# Altium PCB Main.PcbDoc
Units mil, origin at the board's own origin, x right, y up, seen from the top; angles counter-clockwise.
Board outline 2640 x 3555 mil, 2 copper layers (Top Layer, Bottom Layer); 7 components, 18 nets, 258 pads, 0 vias.
Unrouted connection lines stored in the file: 35.
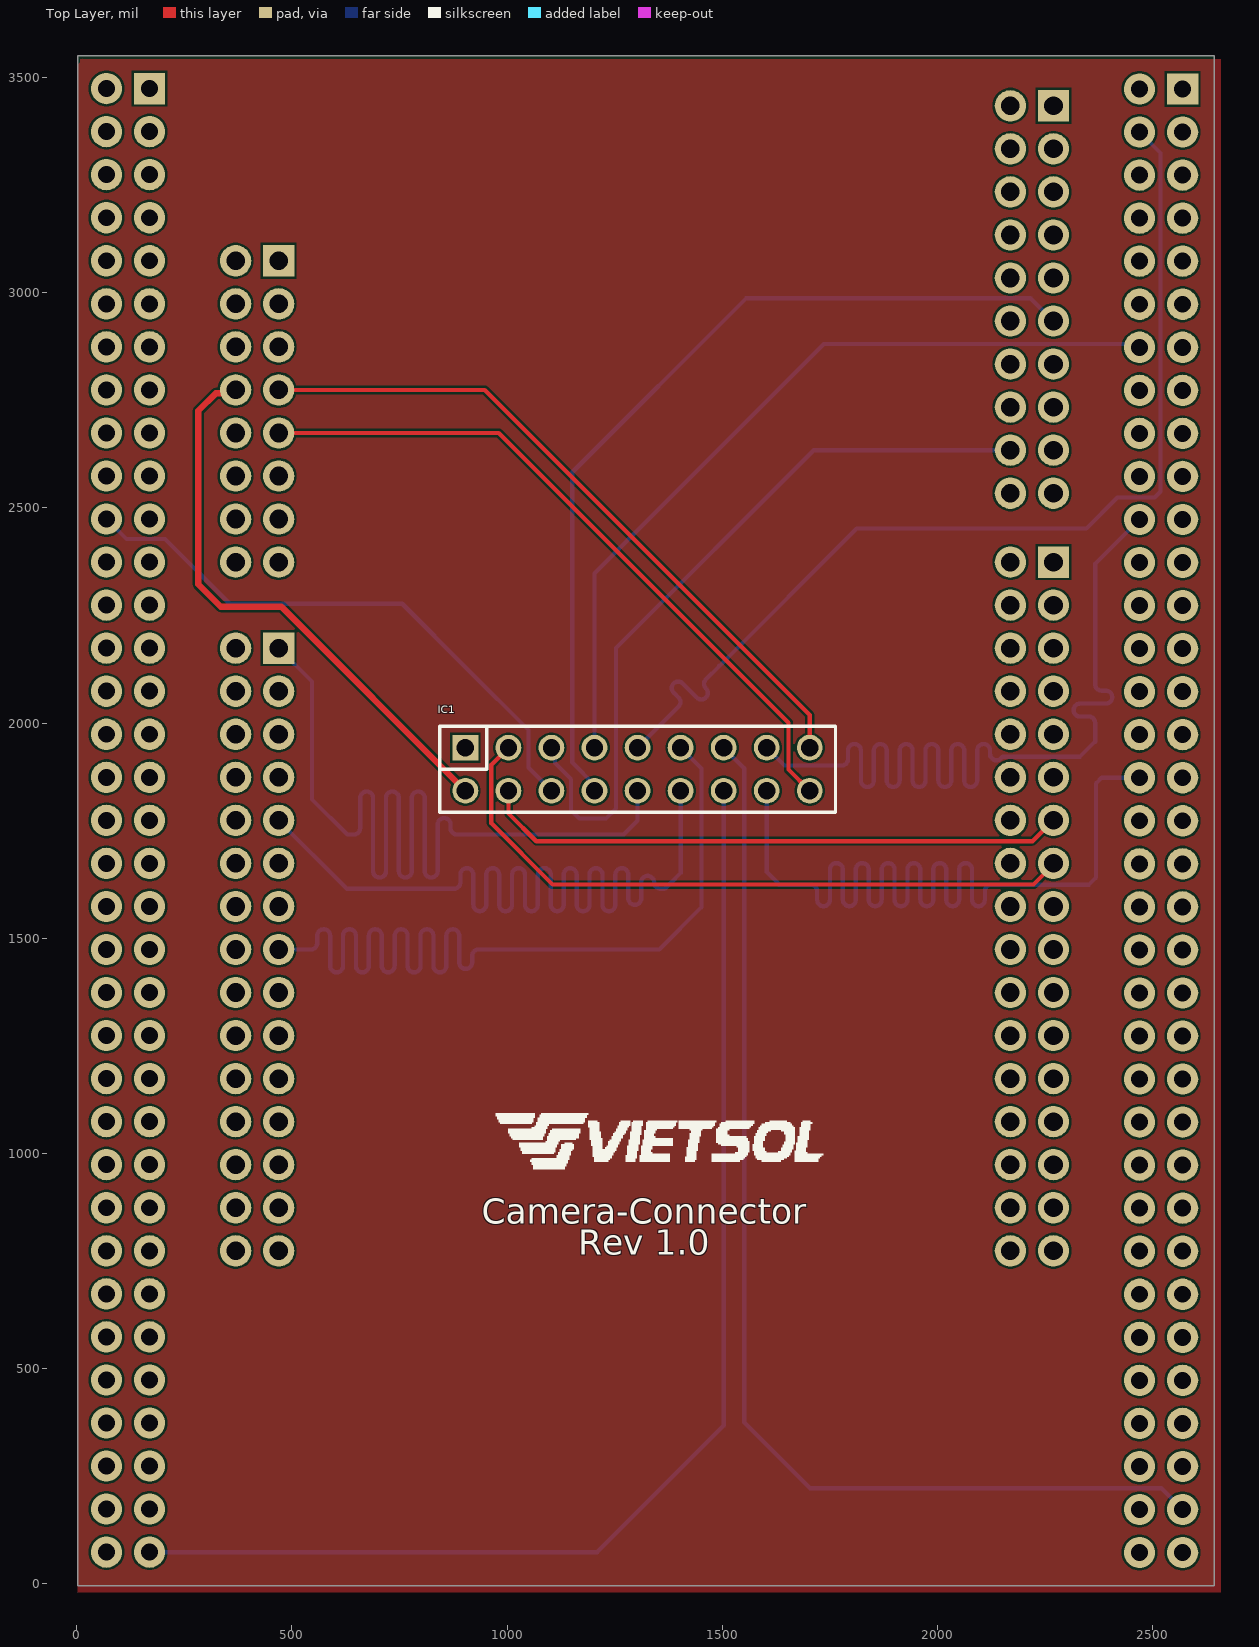
[diagram p0: Top Layer view]
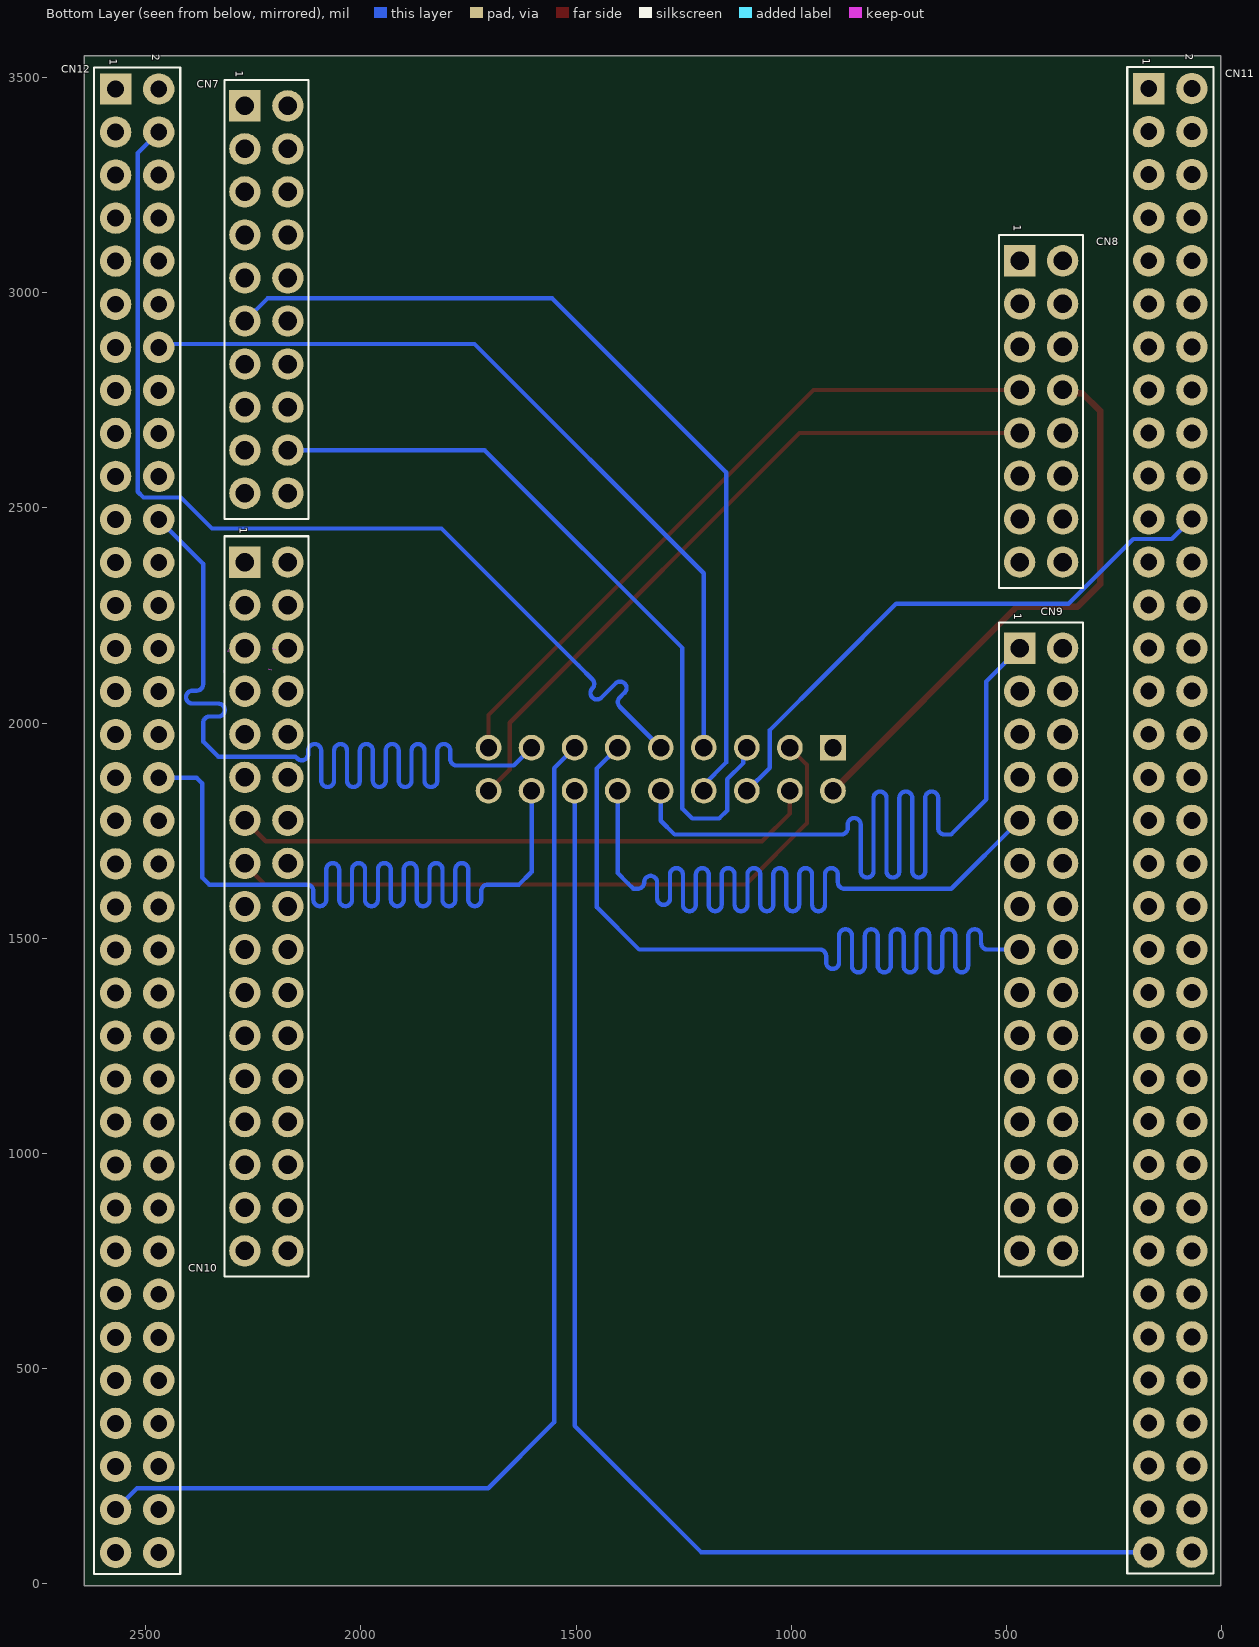
[diagram p1: Bottom Layer view, seen from below]
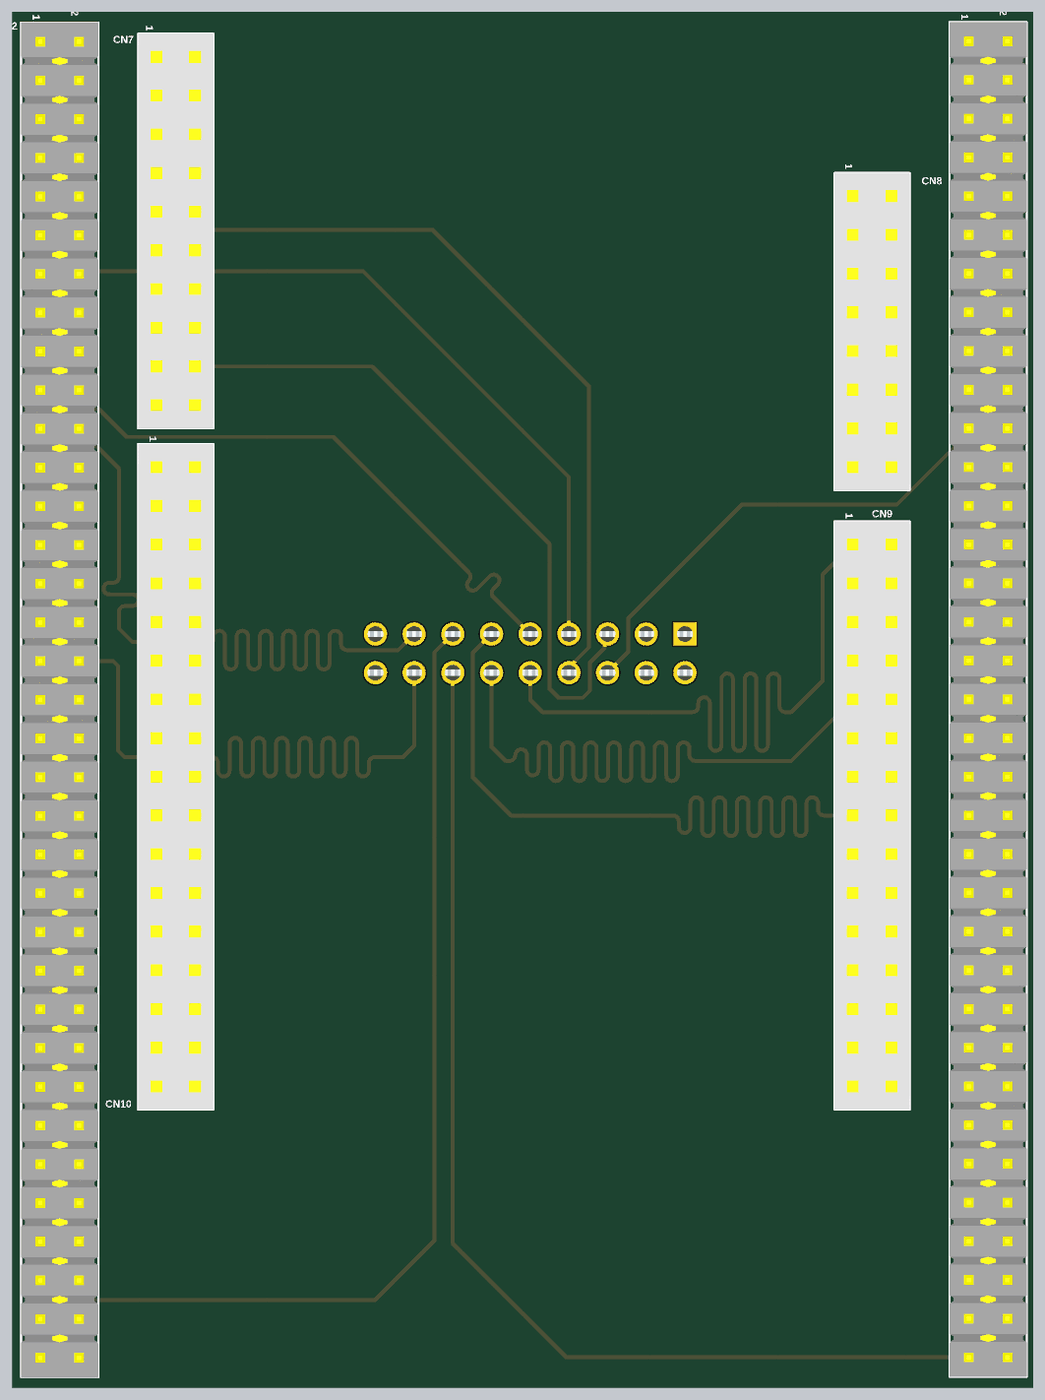
[diagram p2: 3D render of the assembled board from below, using the file's embedded part models]

## Layer stack, top to bottom
Top Solder: solder mask 0.4, Solder Resist, Dk 3.5
Top Layer: signal copper 1.4
Dielectric 1: dielectric 12.6, FR-4, Dk 4.8
Bottom Layer: signal copper 1.4
Bottom Solder: solder mask 0.4, Solder Resist, Dk 3.5

## Board outline
2.54,-4.58 2642.54,-4.58 2642.54,3550.42 2.54,3550.42

## Design rules (kind name [scope] priority, off if disabled: settings)
Clearance Clearance_1 [InNamedPolygon('Kyuubi')] p1: gap=12 ignorepadtopadclearanceinfootprint=FALSE
Clearance [All] p2: gap=5 ignorepadtopadclearanceinfootprint=TRUE
Length [InNetClass('Data')] p1: maxlimit=100000 minlimit=0
MatchedLengths [InNetClass('Data')] p1: tolerance=1000 checknetsindiffpair=FALSE checkdiffpairvsdiffpair=TRUE checkxsignals=TRUE checkothers=TRUE
PolygonConnect [All] p1: connectstyle=Relief reliefconductorwidth=10 reliefentries=4 polygonreliefangle="90 Angle" airgapwidth=10
RoutingVias [All] p1: holewidth=28 width=50 viastyle="Through Hole" minholewidth=28 minwidth=50 maxholewidth=28 maxwidth=50
SolderMaskExpansion [All] p1: expansion=4 istentingtop=FALSE
Width [All] p1: maxlimit=60 minlimit=10 preferedwidth=20
30 further rules are at their usual default settings.

## Classes and differential pairs
net class Data: D0 D1 D2 D3 D4 D5 D6 D7 PLK XLK
component class Main: IC1

## Components (designator, comment, footprint, x,y, rotation, side; value= is the part's Value field where it differs from the comment)
CN7 "Socket 10x2_N144_ARD" CON_SAMTEC_SSW-110-23-X-D_N144_ARD 2219.48,2983.91 r90 bottom locked
CN8 "Socket 8x2_N144_ARD" CON_SAMTEC_SSW-108-23-X-D_N144_ARD 419.48,2723.91 r90 bottom locked
CN9 "Socket 15x2_N144_ARD" CON_SAMTEC_SSW-115-23-X-D_N144_ARD 419.48,1473.91 r90 bottom locked
CN10 "Socket 17x2_N144_ARD" CON_SAMTEC_SSW-117-23-X-D_N144_ARD 2219.48,1573.91 r90 bottom locked
CN11 "Header 35x2" CON_SAMTEC_TSW-135-07-X-D 119.48,1773.91 r270 bottom locked
CN12 "Header 35x2" CON_SAMTEC_TSW-135-07-X-D 2519.48,1772.93 r270 bottom locked
IC1 "Header 2*9 2.54cm" "Header 2*9 2.54cm" 1076.27,1959.77 r0 top

## Footprints (in the part's own frame and the unit in brackets; to place one, negate y for a bottom-side part, rotate by r counter-clockwise, add the part's x,y. Pads: shape width x height; smd on the part's side, far side on the other; paste and mask are expansions set on the pad)
CON_SAMTEC_SSW-108-23-X-D_N144_ARD [mm] "NUCLEO144_ARDUINO CONNECTOR"
  rect 1.85x1.85 / inner round 1.85 / far side rect 1.85x1.85 hole 1.1 mask+0.05: 1(8.89,1.27)
  round 1.85 hole 1.1 mask+0.05: 2(8.89,-1.27) 3(6.35,1.27) 4(6.35,-1.27) 5(3.81,1.27) 6(3.81,-1.27) 7(1.27,1.27) 8(1.27,-1.27) 9(-1.27,1.27) 10(-1.27,-1.27) 11(-3.81,1.27) 12(-3.81,-1.27) 13(-6.35,1.27) 14(-6.35,-1.27) 15(-8.89,1.27) 16(-8.89,-1.27)
  silkscreen extent -10.42,-2.47 10.42,2.47, body extent -10.42,-2.48 10.42,2.48, height 8.51
CON_SAMTEC_SSW-110-23-X-D_N144_ARD [mm] "NUCLEO144_ARDUINO CONNECTOR"
  rect 1.85x1.85 / inner round 1.85 / far side rect 1.85x1.85 hole 1.1 mask+0.05: 1(11.43,1.27)
  round 1.85 hole 1.1 mask+0.05: 2(11.43,-1.27) 3(8.89,1.27) 4(8.89,-1.27) 5(6.35,1.27) 6(6.35,-1.27) 7(3.81,1.27) 8(3.81,-1.27) 9(1.27,1.27) 10(1.27,-1.27) 11(-1.27,1.27) 12(-1.27,-1.27) 13(-3.81,1.27) 14(-3.81,-1.27) 15(-6.35,1.27) 16(-6.35,-1.27) 17(-8.89,1.27) 18(-8.89,-1.27) 19(-11.43,1.27) 20(-11.43,-1.27)
  silkscreen extent -12.96,-2.47 12.96,2.47, body extent -12.96,-2.48 12.96,2.48, height 8.51
CON_SAMTEC_SSW-115-23-X-D_N144_ARD [mm] "NUCLEO144_ARDUINO CONNECTOR"
  rect 1.85x1.85 / inner round 1.85 / far side rect 1.85x1.85 hole 1.1 mask+0.05: 1(17.78,1.27)
  round 1.85 hole 1.1 mask+0.05: 2(17.78,-1.27) 3(15.24,1.27) 4(15.24,-1.27) 5(12.7,1.27) 6(12.7,-1.27) 7(10.16,1.27) 8(10.16,-1.27) 9(7.62,1.27) 10(7.62,-1.27) 11(5.08,1.27) 12(5.08,-1.27) 13(2.54,1.27) 14(2.54,-1.27) 15(0,1.27) 16(0,-1.27) 17(-2.54,1.27) 18(-2.54,-1.27) 19(-5.08,1.27) 20(-5.08,-1.27) 21(-7.62,1.27) 22(-7.62,-1.27) 23(-10.16,1.27) 24(-10.16,-1.27) 25(-12.7,1.27) 26(-12.7,-1.27) 27(-15.24,1.27) 28(-15.24,-1.27) 29(-17.78,1.27) 30(-17.78,-1.27)
  silkscreen extent -19.31,-2.47 19.31,2.47, body extent -19.31,-2.48 19.31,2.48, height 8.51
CON_SAMTEC_SSW-117-23-X-D_N144_ARD [mm] "NUCLEO144_ARDUINO CONNECTOR"
  rect 1.85x1.85 / inner round 1.85 / far side rect 1.85x1.85 hole 1.1 mask+0.05: 1(20.32,1.27)
  round 1.85 hole 1.1 mask+0.05: 2(20.32,-1.27) 3(17.78,1.27) 4(17.78,-1.27) 5(15.24,1.27) 6(15.24,-1.27) 7(12.7,1.27) 8(12.7,-1.27) 9(10.16,1.27) 10(10.16,-1.27) 11(7.62,1.27) 12(7.62,-1.27) 13(5.08,1.27) 14(5.08,-1.27) 15(2.54,1.27) 16(2.54,-1.27) 17(0,1.27) 18(0,-1.27) 19(-2.54,1.27) 20(-2.54,-1.27) 21(-5.08,1.27) 22(-5.08,-1.27) 23(-7.62,1.27) 24(-7.62,-1.27) 25(-10.16,1.27) 26(-10.16,-1.27) 27(-12.7,1.27) 28(-12.7,-1.27) 29(-15.24,1.27) 30(-15.24,-1.27) 31(-17.78,1.27) 32(-17.78,-1.27) 33(-20.32,1.27) 34(-20.32,-1.27)
  silkscreen extent -21.85,-2.47 21.85,2.47, body extent -21.85,-2.48 21.85,2.48, height 8.51
CON_SAMTEC_TSW-135-07-X-D [mm]
  rect 1.85x1.85 / inner round 1.85 / far side rect 1.85x1.85 hole 1 mask+0.05: 1(-43.18,-1.27)
  round 1.85 hole 1 mask+0.05: 2(-43.18,1.27) 3(-40.64,-1.27) 4(-40.64,1.27) 5(-38.1,-1.27) 6(-38.1,1.27) 7(-35.56,-1.27) 8(-35.56,1.27) 9(-33.02,-1.27) 10(-33.02,1.27) 11(-30.48,-1.27) 12(-30.48,1.27) 13(-27.94,-1.27) 14(-27.94,1.27) 15(-25.4,-1.27) 16(-25.4,1.27) 17(-22.86,-1.27) 18(-22.86,1.27) 19(-20.32,-1.27) 20(-20.32,1.27) 21(-17.78,-1.27) 22(-17.78,1.27) 23(-15.24,-1.27) 24(-15.24,1.27) 25(-12.7,-1.27) 26(-12.7,1.27) 27(-10.16,-1.27) 28(-10.16,1.27) 29(-7.62,-1.27) 30(-7.62,1.27) 31(-5.08,-1.27) 32(-5.08,1.27) 33(-2.54,-1.27) 34(-2.54,1.27) 35(0,-1.27) 36(0,1.27) 37(2.54,-1.27) 38(2.54,1.27) 39(5.08,-1.27) 40(5.08,1.27) 41(7.62,-1.27) 42(7.62,1.27) 43(10.16,-1.27) 44(10.16,1.27) 45(12.7,-1.27) 46(12.7,1.27) 47(15.24,-1.27) 48(15.24,1.27) 49(17.78,-1.27) 50(17.78,1.27) 51(20.32,-1.27) 52(20.32,1.27) 53(22.86,-1.27) 54(22.86,1.27) 55(25.4,-1.27) 56(25.4,1.27) 57(27.94,-1.27) 58(27.94,1.27) 59(30.48,-1.27) 60(30.48,1.27) 61(33.02,-1.27) 62(33.02,1.27) 63(35.56,-1.27) 64(35.56,1.27) 65(38.1,-1.27) 66(38.1,1.27) 67(40.64,-1.27) 68(40.64,1.27) 69(43.18,-1.27) 70(43.18,1.27)
  silkscreen extent -44.45,-2.54 44.45,2.54, body extent -44.45,-2.54 44.45,2.54, height 8.38
"Header 2*9 2.54cm" [mm]
  rect 1.52x1.52 hole 1.02: 1(-4.394,-0.432)
  round 1.52 hole 1.02: 2(-1.854,-0.432) 3(0.686,-0.432) 4(3.226,-0.432) 5(5.766,-0.432) 6(8.306,-0.432) 7(10.846,-0.432) 8(13.386,-0.432) 9(15.926,-0.432) 10(15.926,-2.972) 11(13.386,-2.972) 12(10.846,-2.972) 13(8.306,-2.972) 14(5.766,-2.972) 15(3.226,-2.972) 16(0.686,-2.972) 17(-1.854,-2.972) 18(-4.394,-2.972)
  silkscreen extent -5.91,-4.24 17.45,0.84, body extent -5.91,-4.24 17.45,0.84, height 8.51

## Part data
CN7: library part MCD-01039, "Socket, 10x2, 2.54mm, VR, TH, Height 8.51mm/10mm, Low insertion force.", Manufacturer=SAMTEC, Manufacturer_Part_Number=SSW-110-23-x-D, ComponentLink1Description=Datasheet, ComponentLink1URL=http://tunmcdsvn.tun.st.com/Component_Datasheet_Library/Trunk/Connectors/Samtec_SSW-SSQ-series, Initial_Board_Reference=MB1361, Internal_Part_Number=MCD-01039, Part_Type=Connector, Provided_By=Subcon, Remark="Socket dedicated to Arduino+ZIO connector on NUCLEO144", Status=Checked
CN8: library part MCD-01037, "Socket, 8x2, 2.54mm, VR, TH, Height 8.51mm/10mm, Low insertion force.", Manufacturer=SAMTEC, Manufacturer_Part_Number=SSW-108-23-x-D, ComponentLink1Description=Datasheet, ComponentLink1URL=http://tunmcdsvn.tun.st.com/Component_Datasheet_Library/Trunk/Connectors/Samtec_SSW-SSQ-series, Initial_Board_Reference=MB1361, Internal_Part_Number=MCD-01037, Part_Type=Connector, Provided_By=Subcon, Remark="Socket dedicated to Arduino+ZIO connector on NUCLEO144", Status=Checked
CN9: library part MCD-01040, "Socket, 15x2, 2.54mm, VR, TH, Height 8.51mm/10mm, Low insertion force.", Manufacturer=SAMTEC, Manufacturer_Part_Number=SSW-115-23-x-D, ComponentLink1Description=Datasheet, ComponentLink1URL=http://tunmcdsvn.tun.st.com/Component_Datasheet_Library/Trunk/Connectors/Samtec_SSW-SSQ-series, Initial_Board_Reference=MB1361, Internal_Part_Number=MCD-01040, Part_Type=Connector, Provided_By=Subcon, Remark="Socket dedicated to Arduino+ZIO connector on NUCLEO144", Status=Checked
CN10: library part MCD-01041, "Socket, 17x2, 2.54mm, VR, TH, Height 8.51mm/10mm, Low insertion force", Manufacturer=SAMTEC, Manufacturer_Part_Number=SSW-117-23-x-D, ComponentLink1Description=Datasheet, ComponentLink1URL=http://tunmcdsvn.tun.st.com/Component_Datasheet_Library/Trunk/Connectors/Samtec_SSW-SSQ-series, Initial_Board_Reference=MB1361, Internal_Part_Number=MCD-01041, Part_Type=Connector, Provided_By=Subcon, Remark="Socket dedicated to Arduino+ZIO connector on NUCLEO144", Status=Checked
CN11 CN12: library part MCD-01210, "Header, 35x2, 2,54mm, VR, TH, Height 5.84mm/2.54mm", Manufacturer=SAMTEC, Manufacturer_Part_Number=TSW-135-07-x-D, ComponentLink1Description=Datasheet, ComponentLink1URL=http://tunmcdsvn.tun.st.com/Component_Datasheet_Library/Trunk/Connectors/Samtec_TSW-HTSW-series, Initial_Board_Reference=MB1361, Internal_Part_Number=MCD-01210, Part_Type=Connector, Provided_By=Subcon, Status=Checked

## Nets (pads, with @x,y where several pads share a name; then routed paths per layer and width w, separated by ;. In a path a pad name is that pad's centre, name@x,y a point inside that pad or via, vN(x,y) a via of type N, cw(c..) or ccw(c..) an arc to the next point about the centre after c; other vN are vias at no path point)
3V3: CN8.8 CN11.6 CN11.15 IC1.18 | length 1328.9
  Top Layer w15: CN8.8 361.84,2766.27 323.81,2766.27 282.7,2725.17 282.7,2322.58 335.28,2270 476.05,2270 IC1.18
D0: CN7.2 CN12.3 CN12.22 IC1.8 | length 2430.6
  Bottom Layer w10: IC1.8 1644.85,1901.19 1772.16,1901.19 1777.16,1901.19 ccw(c1777.16,1916.19) 1792.16,1916.19 1792.16,1936.19 cw(c1807.16,1936.19) 1822.16,1936.19 1822.16,1866.19 ccw(c1837.16,1866.19) 1852.16,1866.19 1852.16,1936.19 cw(c1867.16,1936.19) 1882.16,1936.19 1882.16,1866.19 ccw(c1897.16,1866.19) 1912.16,1866.19 1912.16,1936.19 cw(c1927.16,1936.19) 1942.16,1936.19 1942.16,1866.19 ccw(c1957.16,1866.19) 1972.16,1866.19 1972.16,1936.19 cw(c1987.16,1936.19) 2002.16,1936.19 2002.16,1866.19 ccw(c2017.16,1866.19) 2032.16,1866.19 2032.16,1936.19 cw(c2047.16,1936.19) 2062.16,1936.19 2062.16,1866.19 ccw(c2077.16,1866.19) 2092.16,1866.19 2092.16,1936.19 cw(c2107.16,1936.19) 2122.16,1936.19 2122.16,1928.45 ccw(c2137.16,1928.45) 2147.77,1917.84 2151.82,1921.89 2201.67,1921.89 2331.34,1921.89 2366.26,1956.82 2366.26,1995.17 2366.26,2000.17 ccw(c2351.26,2000.17) 2351.26,2015.17 2331.26,2015.17 cw(c2331.26,2030.17) 2331.26,2045.17 2391.06,2045.17 ccw(c2391.06,2060.17) 2391.06,2075.17 2381.26,2075.17 cw(c2381.26,2090.17) 2366.26,2090.17 2366.26,2175.26 2366.26,2369.71 CN12.22
D1: CN7.12 CN12.20 CN12.34 IC1.11 | length 2418
  Bottom Layer w10: IC1.11 1603.27,1654.02 1605.05,1652.25 1632.71,1624.58 1705.3,1624.58 cw(c1705.3,1609.58) 1720.3,1609.58 1720.3,1589.58 ccw(c1735.3,1589.58) 1750.3,1589.58 1750.3,1659.58 cw(c1765.3,1659.58) 1780.3,1659.58 1780.3,1589.58 ccw(c1795.3,1589.58) 1810.3,1589.58 1810.3,1659.58 cw(c1825.3,1659.58) 1840.3,1659.58 1840.3,1589.58 ccw(c1855.3,1589.58) 1870.3,1589.58 1870.3,1659.58 cw(c1885.3,1659.58) 1900.3,1659.58 1900.3,1589.58 ccw(c1915.3,1589.58) 1930.3,1589.58 1930.3,1659.58 cw(c1945.3,1659.58) 1960.3,1659.58 1960.3,1589.58 ccw(c1975.3,1589.58) 1990.3,1589.58 1990.3,1659.58 cw(c2005.3,1659.58) 2020.3,1659.58 2020.3,1589.58 ccw(c2035.3,1589.58) 2050.3,1589.58 2050.3,1659.58 cw(c2065.3,1659.58) 2080.3,1659.58 2080.3,1589.58 ccw(c2095.3,1589.58) 2110.3,1589.58 2110.3,1609.58 cw(c2125.3,1609.58) 2125.3,1624.58 2130.3,1624.58 2352.04,1624.58 2368.3,1640.84 2368.3,1859.79 2381.44,1872.93 CN12.34
D2: CN8.1 CN12.1 CN12.67 IC1.7 | length 2689.5
  Bottom Layer w10: IC1.7 1550.92,1895.12 1550.92,375.41 1704.09,222.25 1760.47,222.25 1772.92,222.25 1913.13,222.25 2520.16,222.25 CN12.67
D3: CN11.69 IC1.12 | length 2930.6
  Bottom Layer w10: CN11.69 1209.55,73.91 1503.27,367.64 IC1.12
D4: CN9.15 CN11.47 IC1.6 | length 2430.6
  Bottom Layer w10: CN9.15 539.03,1473.91 544.03,1473.91 ccw(c544.03,1488.91) 559.03,1488.91 559.03,1505.87 cw(c574.03,1505.87) 589.03,1505.87 589.03,1435.87 ccw(c604.03,1435.87) 619.03,1435.87 619.03,1505.87 cw(c634.03,1505.87) 649.03,1505.87 649.03,1435.87 ccw(c664.03,1435.87) 679.03,1435.87 679.03,1505.87 cw(c694.03,1505.87) 709.03,1505.87 709.03,1435.87 ccw(c724.03,1435.87) 739.03,1435.87 739.03,1505.87 cw(c754.03,1505.87) 769.03,1505.87 769.03,1435.87 ccw(c784.03,1435.87) 799.03,1435.87 799.03,1505.87 cw(c814.03,1505.87) 829.03,1505.87 829.03,1435.87 ccw(c844.03,1435.87) 859.03,1435.87 859.03,1505.87 cw(c874.03,1505.87) 889.03,1505.87 889.03,1443.76 ccw(c904.03,1443.76) 919.03,1443.76 919.03,1458.91 cw(c934.03,1458.91) 934.03,1473.91 1244.93,1473.91 1353.52,1473.91 1451.86,1572.26 1451.86,1894.18 IC1.6
D5: CN9.9 CN11.39 CN12.18 IC1.13 | length 2430.6
  Bottom Layer w10: CN9.9 628.47,1614.93 871.73,1614.93 876.73,1614.93 ccw(c876.73,1629.93) 891.73,1629.93 891.73,1647.9 cw(c906.73,1647.9) 921.73,1647.9 921.73,1577.9 ccw(c936.73,1577.9) 951.73,1577.9 951.73,1647.9 cw(c966.73,1647.9) 981.73,1647.9 981.73,1577.9 ccw(c996.73,1577.9) 1011.73,1577.9 1011.73,1647.9 cw(c1026.73,1647.9) 1041.73,1647.9 1041.73,1577.9 ccw(c1056.73,1577.9) 1071.73,1577.9 1071.73,1647.9 cw(c1086.73,1647.9) 1101.73,1647.9 1101.73,1577.9 ccw(c1116.73,1577.9) 1131.73,1577.9 1131.73,1647.9 cw(c1146.73,1647.9) 1161.73,1647.9 1161.73,1577.9 ccw(c1176.73,1577.9) 1191.73,1577.9 1191.73,1647.9 cw(c1206.73,1647.9) 1221.73,1647.9 1221.73,1577.9 ccw(c1236.73,1577.9) 1251.73,1577.9 1251.73,1647.9 cw(c1266.73,1647.9) 1281.73,1647.9 1281.73,1592.65 ccw(c1296.73,1592.65) 1311.73,1592.65 1311.73,1629.93 cw(c1326.73,1629.93) 1341.73,1629.93 ccw(c1356.73,1629.93) 1356.73,1614.93 1366.77,1614.93 1380.24,1628.39 1403.27,1651.43 IC1.13
D6: CN9.17 CN11.49 CN12.4 IC1.5 | length 2430.6
  Bottom Layer w10: IC1.5 1395.01,2034.5 1398.54,2038.04 ccw(c1387.94,2048.64) 1398.54,2059.25 1387.15,2070.64 cw(c1397.76,2081.25) 1387.15,2091.86 cw(c1397.76,2081.25) 1408.36,2091.86 1440.97,2059.25 ccw(c1451.58,2069.86) 1462.18,2059.25 ccw(c1451.58,2069.86) 1462.18,2080.46 cw(c1472.79,2091.07) 1462.18,2101.68 1493.3,2132.8 1812.62,2452.12 2345.94,2452.12 2417.57,2523.74 2504.69,2523.74 2518.16,2537.21 2518.16,3324.26 CN12.4
D7: CN9.1 CN9.19 CN11.61 CN12.6 IC1.14 | length 2430.6
  Bottom Layer w10: CN9.1 546.86,2096.53 546.86,1822.7 628.65,1740.92 638.81,1740.92 643.81,1740.92 ccw(c643.81,1755.92) 658.81,1755.92 658.81,1825.92 cw(c673.81,1825.92) 688.81,1825.92 688.81,1655.92 ccw(c703.81,1655.92) 718.81,1655.92 718.81,1825.92 cw(c733.81,1825.92) 748.81,1825.92 748.81,1655.92 ccw(c763.81,1655.92) 778.81,1655.92 778.81,1825.92 cw(c793.81,1825.92) 808.81,1825.92 808.81,1655.92 ccw(c823.81,1655.92) 838.81,1655.92 838.81,1764.46 cw(c853.81,1764.46) 868.81,1764.46 868.81,1755.92 ccw(c883.81,1755.92) 883.81,1740.92 937.77,1740.92 1271.02,1740.92 1303.27,1773.17 IC1.14
GND: CN7.7 CN8.12 CN8.14 CN9.11 CN9.24 CN10.18 CN10.21 CN10.28 CN11.7 CN11.19 CN11.20 CN11.21 CN11.50 CN11.59 CN12.10 CN12.19 CN12.40 IC1.1
HSYNC: CN7.18 CN11.31 IC1.3 | length 1766.7
  Bottom Layer w10: IC1.3 1111.28,1934.76 1111.28,1907.25 1148.84,1869.69 1148.84,1796.8 1167.64,1778 1230.12,1778 1252.98,1800.86 1252.98,2174.49 1712.4,2633.91 CN7.18
PLK: CN7.11 IC1.15 | length 2068.6
  Bottom Layer w10: IC1.15 1203.27,1856.26 1151.38,1908.15 1151.38,2582.67 1555.24,2986.53 2216.86,2986.53 CN7.11
PWDN: CN8.7 IC1.9 | length 1622.6
  Top Layer w10: CN8.7 948.2,2773.91 1703.27,2018.84 IC1.9
RESET: CN8.9 IC1.10 | length 1641.8
  Top Layer w10: CN8.9 980.89,2673.91 1612.14,2042.67 1654.05,2000.76 1654.05,1892 IC1.10
SCL: CN10.13 IC1.17 | length 1366.2
  Top Layer w10: IC1.17 1003.27,1789.71 1067.82,1725.17 2220.74,1725.17 CN10.13
SDA: CN10.15 IC1.2 | length 1578.9
  Top Layer w10: IC1.2 963.35,1902.85 963.35,1767.4 1105.92,1624.84 2223.01,1624.84 2269.48,1671.31 CN10.15
VSYNC: CN11.22 CN11.64 IC1.16 | length 1346.5
  Bottom Layer w10: CN11.22 115.9,2427.5 205.47,2427.5 355.85,2277.11 756.41,2277.11 909.57,2123.95 1049.78,1983.74 1049.78,1896.26 IC1.16
XLK: CN12.14 IC1.4 | length 1894.9
  Bottom Layer w10: IC1.4 1203.27,2347.8 1735.81,2880.33 2462.08,2880.33 CN12.14
pads on no net: CN7.1 CN7.3 CN7.4 CN7.5 CN7.6 CN7.8 CN7.9 CN7.10 CN7.13 CN7.14 CN7.15 CN7.16 CN7.17 CN7.19 CN7.20 CN8.2 CN8.3 CN8.4 CN8.5 CN8.6 CN8.10 CN8.11 CN8.13 CN8.15 CN8.16 CN9.2 CN9.3 CN9.4 CN9.5 CN9.6 CN9.7 CN9.8 CN9.10 CN9.12 CN9.13 CN9.14 CN9.16 CN9.18 CN9.20 CN9.21 CN9.22 CN9.23 CN9.25 CN9.26 CN9.27 CN9.28 CN9.29 CN9.30 CN10.1 CN10.2 CN10.3 CN10.4 CN10.5 CN10.6 CN10.7 CN10.8 CN10.9 CN10.10 CN10.11 CN10.12 CN10.14 CN10.16 CN10.17 CN10.19 CN10.20 CN10.22 CN10.23 CN10.24 CN10.25 CN10.26 CN10.27 CN10.29 CN10.30 CN10.31 CN10.32 CN10.33 CN10.34 CN11.1 CN11.2 CN11.3 CN11.4 CN11.5 CN11.8 CN11.9 CN11.10 CN11.11 CN11.12 CN11.13 CN11.14 CN11.16 CN11.17 CN11.18 CN11.23 CN11.24 CN11.25 CN11.26 CN11.27 CN11.28 CN11.29 CN11.30 CN11.32 CN11.33 CN11.34 CN11.35 CN11.36 CN11.37 CN11.38 CN11.40 CN11.41 CN11.42 CN11.43 CN11.44 CN11.45 CN11.46 CN11.48 CN11.51 CN11.52 CN11.53 CN11.54 CN11.55 CN11.56 CN11.57 CN11.58 CN11.60 CN11.62 CN11.63 CN11.65 CN11.66 CN11.67 CN11.68 CN11.70 CN12.2 CN12.5 CN12.7 CN12.8 CN12.9 CN12.11 CN12.12 CN12.13 CN12.15 CN12.16 CN12.17 CN12.21 CN12.23 CN12.24 CN12.25 CN12.26 CN12.27 CN12.28 CN12.29 CN12.30 CN12.31 CN12.32 CN12.33 CN12.35 CN12.36 CN12.37 CN12.38 CN12.39 CN12.41 CN12.42 CN12.43 CN12.44 CN12.45 CN12.46 CN12.47 CN12.48 CN12.49 CN12.50 CN12.51 CN12.52 CN12.53 CN12.54 CN12.55 CN12.56 CN12.57 CN12.58 CN12.59 CN12.60 CN12.61 CN12.62 CN12.63 CN12.64 CN12.65 CN12.66 CN12.68 CN12.69 CN12.70

## Polygon pours and split planes (outlines as drawn)
no net on Top Layer "NONET_L01_P000" (solid, pour order 0): 8.64,3548.13 14.99,3541.78 2657.86,3541.78 2657.86,-19.56 2.54,-19.56 2.54,3529.58 8.64,3535.68

## Keep-outs
Bottom Layer:
  lines w0.39: 2197.71,2170.74 ccw(c2160.58,2320.74) 2205.79,2172.98 ; 2207.48,2123.05 ccw(c2170.35,2273.05) 2215.56,2125.28 ; 2307,2170.13 cw(c2160.58,2120.74) 2308.29,2166.12 ; 2316.77,2122.43 cw(c2170.35,2073.05) 2318.07,2118.42

## Silkscreen, mask and mechanical layers (free items; w line width, h text height)
Top Overlay:
  drawing of 11 lines, arcs and shapes, not listed
  text "Camera-Connector" at 941.07,817.37 h100
  text "Rev 1.0" at 1165.86,745.17 h100

## Text inside footprints (layer, text, board x,y; h text height)
CN7: Bottom Overlay "1" at 2296.49,3515.3 h30 r90; Mechanical 14 "20" at 2150.98,2506.41 h30 r270; Mechanical 14 "19" at 2250.98,2506.91 h30 r270; Mechanical 14 "1" at 2249.99,3426.83 h30 r270; Mechanical 14 "2" at 2150.59,3420.92 h30 r270
CN8: Bottom Overlay "1" at 488.81,3158.01 h30 r90; Mechanical 14 "2" at 350.59,3061.51 h30 r270; Mechanical 14 "1" at 449.99,3067.42 h30 r270; Mechanical 14 "15" at 450.98,2348.69 h30 r270; Mechanical 14 "16" at 350.98,2348.19 h30 r270
CN9: Bottom Overlay "1" at 487.83,2255.45 h30 r90; Mechanical 14 "2" at 350.59,2160.92 h30 r270; Mechanical 14 "1" at 449.99,2166.83 h30 r270; Mechanical 14 "29" at 450.98,746.91 h30 r270; Mechanical 14 "30" at 350.98,746.41 h30 r270
CN10: Bottom Overlay "1" at 2287.63,2454.27 h30 r90; Mechanical 14 "2" at 2150.59,2361.32 h30 r270; Mechanical 14 "1" at 2251.96,2366.24 h30 r270; Mechanical 14 "33" at 2250.98,746.91 h30 r270; Mechanical 14 "34" at 2150.98,746.41 h30 r270
CN11: Bottom Overlay "1" at 189.37,3544.39 h30 r90; Bottom Overlay "2" at 89.96,3555.21 h30 r90; Mechanical 14 "1" at 188.38,3482.38 h30 r90; Mechanical 14 "2" at 86.02,3486.32 h30 r90; Mechanical 14 "70" at 87,100.29 h30 r90; Mechanical 14 "69" at 187.4,101.28 h30 r90
CN12: Bottom Overlay "1" at 2589.37,3543.4 h30 r90; Bottom Overlay "2" at 2489.96,3554.23 h30 r90; Mechanical 14 "1" at 2588.38,3481.39 h30 r90; Mechanical 14 "2" at 2486.02,3485.33 h30 r90; Mechanical 14 "70" at 2487,99.31 h30 r90; Mechanical 14 "69" at 2587.4,100.29 h30 r90